# Altium PCB PCB.PcbDoc (part 4 of 6)
Units mm, origin at the board's own origin, x right, y up, seen from the top; angles counter-clockwise.
Board outline 56.61 x 57.68 mm, 2 copper layers (Top Layer, Bottom Layer), stack 0.572 mm thick; 104 components, 100 nets, 551 pads, 332 vias.
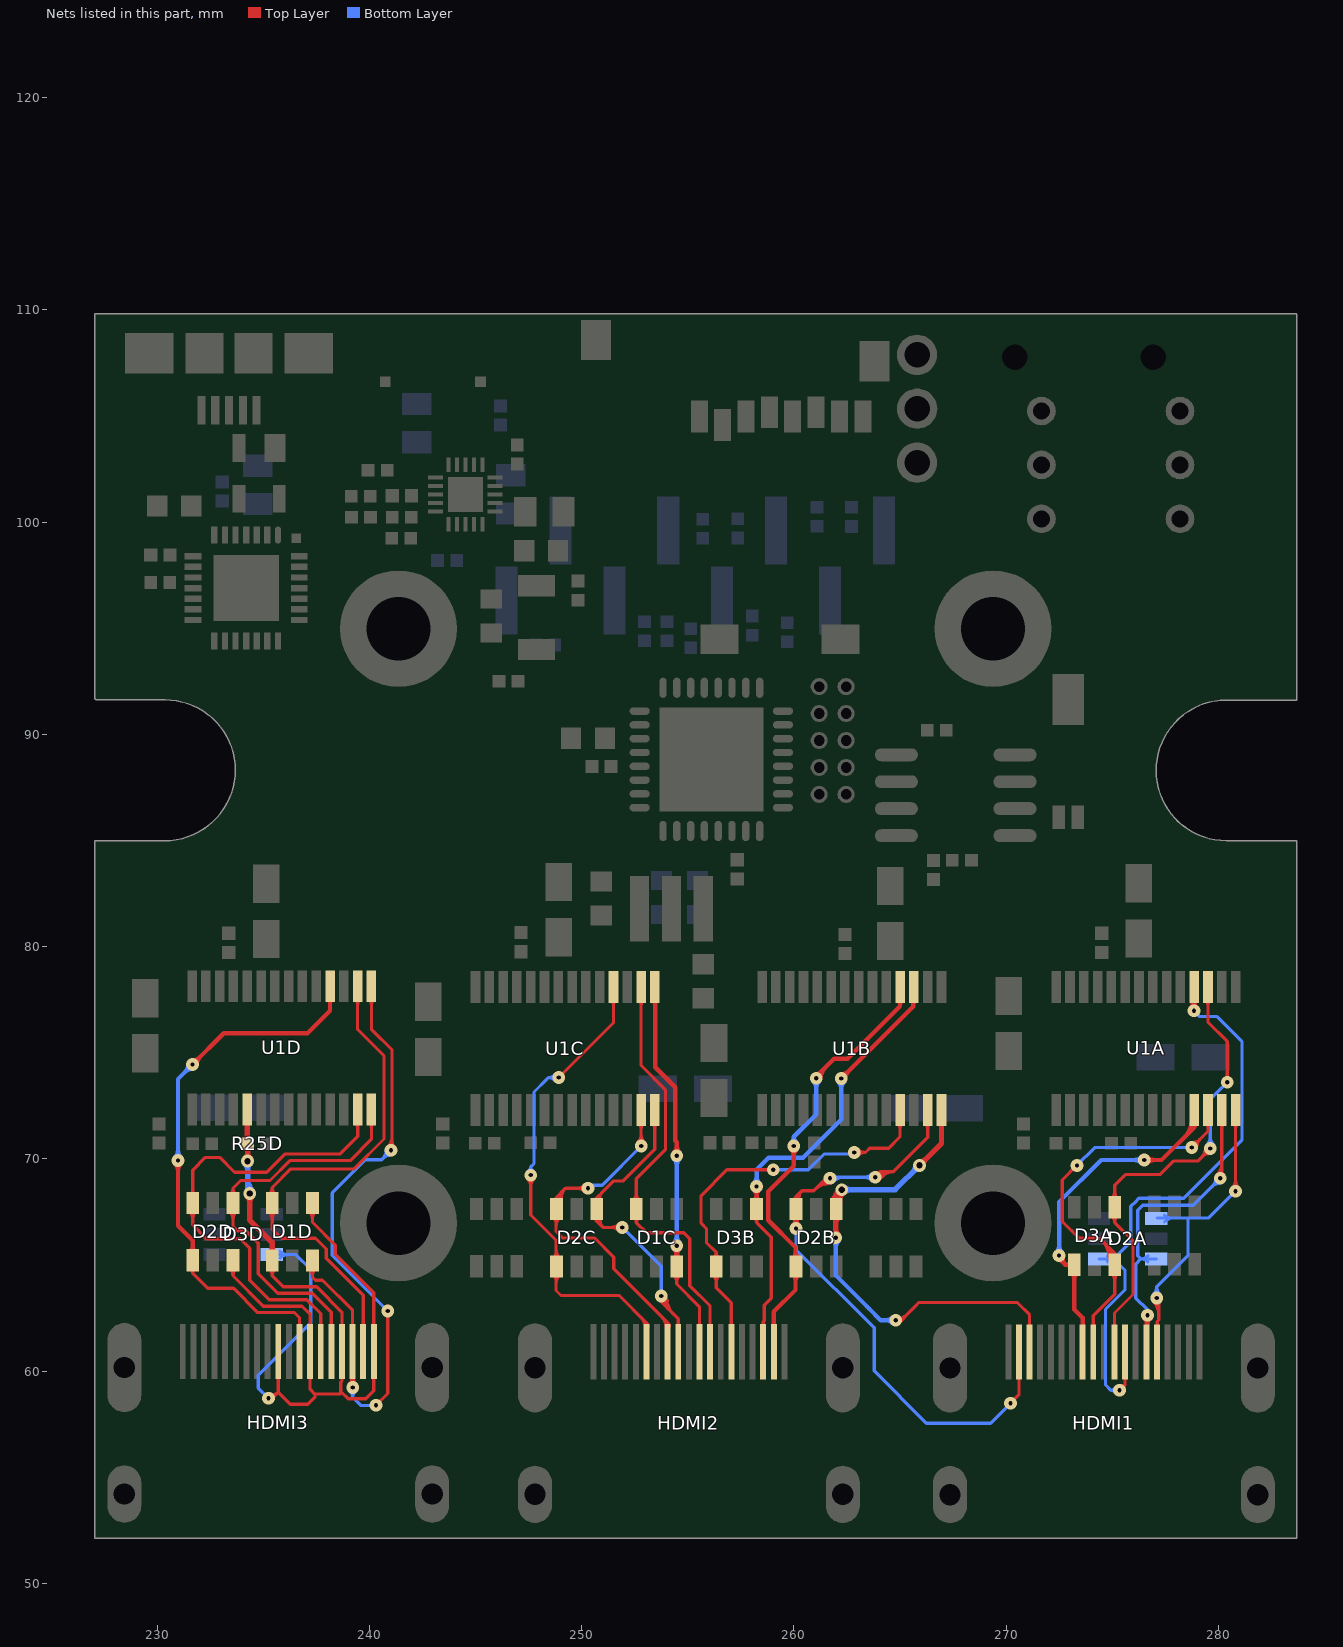
[diagram p4: the nets of this part, all layers, seen from the top]

## Via types
v1: diameter 0.6, hole 0.3, Top Layer to Bottom Layer, tented both sides, 242 vias
v2: diameter 0.6, hole 0.2, Top Layer to Bottom Layer, tented both sides, 80 vias
v3: diameter 0.8, hole 0.4, Top Layer to Bottom Layer, tented both sides, 9 vias
v4: diameter 0.66, hole 0.33, Top Layer to Bottom Layer, tented both sides, 1 vias

## Nets (pads, with @x,y where several pads share a name; then routed paths per layer and width w, separated by ;. In a path a pad name is that pad's centre, name@x,y a point inside that pad or via, vN(x,y) a via of type N, cw(c..) or ccw(c..) an arc to the next point about the centre after c; other vN are vias at no path point) (continued)
NetD1C_3: D1C.3 HDMI2.8 U1C.16 | length 25.1
  Top Layer w0.152: U1C.16@252.8,78.1 252.8,74.402 253.949,73.254 253.949,70.434 252.578,69.063 D1C.3@252.578,67.64 252.578,67.005 ; HDMI2.8@256.05,60.92 256.05,63.076 255.092,64.033 255.092,66.243 254.813,66.523 253.06,66.523 252.578,67.005 ; 252.578,67.005 ccw(c252.314,67.005) 252.457,67.227 cw(c252.314,67.005) 252.578,67.005 ; 252.578,67.005 cw(c252.841,67.005) 252.699,67.227 ccw(c252.841,67.005) 252.578,67.005 ; 252.578,68.405 ccw(c253.118,68.405) 252.736,68.023 cw(c253.118,68.405) 252.578,68.405 ; 252.578,68.405 cw(c252.037,68.405) 252.419,68.023 ccw(c252.037,68.405) 252.578,68.405 ; 252.8,77.216 ccw(c252.441,77.216) 252.695,77.47 cw(c252.441,77.216) 252.8,77.216 ; 252.8,77.216 cw(c253.16,77.216) 252.906,77.47 ccw(c253.16,77.216) 252.8,77.216 ; HDMI2.8@256.007,62.129 ccw(c255.904,62.232) 256.05,62.232 cw(c255.904,62.232) HDMI2.8@256.007,62.129 ; 256.05,62.243 ccw(c256.212,62.243) 256.098,62.129 cw(c256.212,62.243) 256.05,62.243
NetD1C_6: D1C.6 HDMI2.9 U1C.15 | length 32.2
  Top Layer w0.152: 254.478,64.115 D1C.6@254.478,64.94 ; 254.503,64.089 255.55,63.042 HDMI2.9@255.55,60.92 ; 254.478,64.175 ccw(c253.937,64.175) 254.319,64.557 cw(c253.937,64.175) 254.478,64.175 ; 254.478,64.175 cw(c255.018,64.175) 254.636,64.557 ccw(c255.018,64.175) 254.478,64.175 ; HDMI2.9@255.507,62.129 ccw(c255.404,62.232) 255.55,62.232 cw(c255.404,62.232) HDMI2.9@255.507,62.129 ; 255.55,62.243 ccw(c255.712,62.243) 255.598,62.129 cw(c255.712,62.243) 255.55,62.243
  Top Layer w0.203: U1C.15@253.467,78.058 253.467,74.32 254.406,73.381 254.406,70.866 254.483,70.79 v2(254.483,70.155) ; D1C.6@254.369,65.331 ccw(c254.26,65.497) 254.452,65.549 ; D1C.6@254.378,65.337 ccw(c254.249,65.56) 254.499,65.494 ; 254.472,65.474 ccw(c254.689,65.532) D1C.6@254.577,65.337 ; D1C.6@254.483,64.945 254.483,65.811 v2(254.483,65.913) ; 254.518,65.565 ccw(c254.742,65.505) D1C.6@254.599,65.322 ; v2@254.364,65.754 cw(c254.233,65.577) 254.446,65.519 ; v2@254.364,65.754 cw(c254.233,65.577) 254.446,65.519 ; v2@254.364,65.754 cw(c254.233,65.577) 254.446,65.519 ; v2@254.383,65.741 cw(c254.268,65.541) 254.491,65.601 ; v2@254.383,65.741 cw(c254.268,65.541) 254.491,65.601 ; v2@254.383,65.741 cw(c254.268,65.541) 254.491,65.601 ; 254.464,65.588 cw(c254.708,65.523) v2@254.582,65.741 ; 254.464,65.588 cw(c254.708,65.523) v2@254.582,65.741 ; 254.464,65.588 cw(c254.708,65.523) v2@254.582,65.741 ; D1C.6@254.483,65.434 ccw(c254.004,65.434) 254.342,65.773 cw(c254.004,65.434) D1C.6@254.483,65.434 ; D1C.6@254.483,65.434 cw(c254.962,65.434) 254.623,65.773 ccw(c254.962,65.434) D1C.6@254.483,65.434 ; 254.483,70.634 ccw(c254.962,70.634) 254.623,70.295 cw(c254.962,70.634) 254.483,70.634 ; 254.483,70.634 cw(c254.004,70.634) 254.342,70.295 ccw(c254.004,70.634) 254.483,70.634 ; 254.512,65.523 cw(c254.715,65.577) v2@254.595,65.75 ; 254.512,65.523 cw(c254.715,65.577) v2@254.595,65.75 ; 254.512,65.523 cw(c254.715,65.577) v2@254.595,65.75 ; U1C.15@253.363,77.488 cw(c253.113,77.238) 253.467,77.238 ccw(c253.113,77.238) U1C.15@253.363,77.488 ; 253.467,77.316 cw(c253.709,77.316) 253.538,77.488 ccw(c253.709,77.316) 253.467,77.316 ; D1C.6@254.337,65.305 ccw(c253.987,65.656) 254.483,65.656 cw(c253.987,65.656) D1C.6@254.337,65.305 ; v2@254.483,65.632 ccw(c254.945,65.632) 254.618,65.305 cw(c254.945,65.632) v2@254.483,65.632
  Bottom Layer w0.203: v2(254.483,65.913) v2(254.483,70.155) ; 254.483,66.392 ccw(c254.962,66.392) 254.623,66.053 cw(c254.962,66.392) 254.483,66.392 ; 254.483,66.392 cw(c254.004,66.392) 254.342,66.053 ccw(c254.004,66.392) 254.483,66.392 ; 254.483,69.676 ccw(c254.004,69.676) 254.342,70.015 cw(c254.004,69.676) 254.483,69.676 ; 254.483,69.676 cw(c254.962,69.676) 254.623,70.015 ccw(c254.962,69.676) 254.483,69.676
NetD1D_1: D1D.1 D1D.4 D2D.6 D3D.3 HDMI3.1 HDMI3.4 HDMI3.7 HDMI3.10 R25D.2 U1D.5 | length 73.7
  Top Layer w0.152: D2D.6@233.578,65.227 233.578,64.491 ; v2(235.255,58.725) 235.43,58.725 235.711,59.006 ; D1D.4@235.422,65.223 235.422,64.501 ; 235.711,59.028 HDMI3.10@235.711,60.935 ; D1D.1@237.322,67.923 237.322,67.012 238.396,65.938 238.396,65.515 240.211,63.7 HDMI3.1@240.211,60.935 240.211,59.083 239.832,58.704 238.998,58.704 238.689,59.014 238.658,58.984 ; HDMI3.4@238.689,60.913 HDMI3.4@238.709,60.933 ; 233.578,64.491 ccw(c233.106,64.491) 233.427,64.838 cw(c233.106,64.491) 233.578,64.491 ; 233.578,64.491 cw(c234.051,64.491) 233.73,64.838 ccw(c234.051,64.491) 233.578,64.491 ; 233.578,64.491 235.001,63.068 236.83,63.068 237.211,62.687 HDMI3.7@237.211,60.935 237.211,59.157 237.439,58.928 ; 235.422,64.501 ccw(c234.981,64.501) 235.274,64.831 cw(c234.981,64.501) 235.422,64.501 ; 235.422,64.501 cw(c235.864,64.501) 235.571,64.831 ccw(c235.864,64.501) 235.422,64.501 ; 235.422,64.501 235.941,63.983 237.515,63.983 238.711,62.787 HDMI3.4@238.711,60.935 HDMI3.4@238.709,60.933 ; 235.711,59.006 cw(c235.47,59.246) 235.34,58.932 ccw(c235.47,59.246) 235.711,59.006 ; 235.711,59.006 236.271,58.445 237.109,58.445 237.439,58.776 237.439,58.928 ; 235.711,59.621 ccw(c235.557,59.621) 235.665,59.729 cw(c235.557,59.621) 235.711,59.621 ; 235.711,59.621 cw(c235.865,59.621) 235.756,59.729 ccw(c235.865,59.621) 235.711,59.621 ; 237.211,59.621 ccw(c237.057,59.621) 237.165,59.729 cw(c237.057,59.621) 237.211,59.621 ; 237.211,59.621 cw(c237.365,59.621) 237.256,59.729 ccw(c237.365,59.621) 237.211,59.621 ; 237.211,62.249 ccw(c237.365,62.249) 237.256,62.14 cw(c237.365,62.249) 237.211,62.249 ; 237.211,62.249 cw(c237.057,62.249) 237.165,62.14 ccw(c237.057,62.249) 237.211,62.249 ; 237.322,67.158 ccw(c236.782,67.158) 237.164,67.54 cw(c236.782,67.158) 237.322,67.158 ; 237.322,67.158 cw(c237.863,67.158) 237.481,67.54 ccw(c237.863,67.158) 237.322,67.158 ; 237.439,58.928 238.603,58.928 238.658,58.984 ; 238.658,58.984 238.658,59.487 238.709,59.538 HDMI3.4@238.709,60.933 ; 238.711,62.249 ccw(c238.865,62.249) 238.756,62.14 cw(c238.865,62.249) 238.711,62.249 ; 238.711,62.249 cw(c238.557,62.249) 238.665,62.14 ccw(c238.557,62.249) 238.711,62.249 ; 240.211,59.621 ccw(c240.057,59.621) 240.165,59.729 cw(c240.057,59.621) 240.211,59.621 ; 240.211,59.621 cw(c240.365,59.621) 240.256,59.729 ccw(c240.365,59.621) 240.211,59.621 ; 240.211,62.249 ccw(c240.365,62.249) 240.256,62.14 cw(c240.365,62.249) 240.211,62.249 ; 240.211,62.249 cw(c240.057,62.249) 240.165,62.14 ccw(c240.057,62.249) 240.211,62.249 ; v2@235.282,58.791 ccw(c235.376,59.018) 235.549,58.844 cw(c235.376,59.018) v2@235.282,58.791 ; HDMI3.4@238.665,59.729 cw(c238.56,59.624) 238.709,59.624 ccw(c238.56,59.624) HDMI3.4@238.665,59.729 ; 238.709,59.617 cw(c238.868,59.617) 238.756,59.729 ccw(c238.868,59.617) 238.709,59.617
  Top Layer w0.254: R25D.2@234.25,70.727 U1D.5@234.25,72.339 ; v1(234.264,69.901) R25D.2@234.264,70.714 ; v1(234.366,68.377) 234.366,67.132 235.422,66.076 D1D.4@235.422,65.223 ; 234.25,71.578 ccw(c234.014,71.578) 234.181,71.745 cw(c234.014,71.578) 234.25,71.578 ; 234.25,71.578 cw(c234.487,71.578) 234.32,71.745 ccw(c234.487,71.578) 234.25,71.578 ; 234.264,70.296 ccw(c233.847,70.296) 234.142,70.591 cw(c233.847,70.296) 234.264,70.296 ; 234.264,70.296 cw(c234.682,70.296) 234.387,70.591 ccw(c234.682,70.296) 234.264,70.296 ; 234.264,70.318 ccw(c234.682,70.318) 234.387,70.023 cw(c234.682,70.318) 234.264,70.318 ; 234.264,70.318 cw(c233.847,70.318) 234.142,70.023 ccw(c233.847,70.318) 234.264,70.318 ; 234.366,67.959 ccw(c233.948,67.959) 234.243,68.254 cw(c233.948,67.959) 234.366,67.959 ; 234.366,67.959 cw(c234.783,67.959) 234.488,68.254 ccw(c234.783,67.959) 234.366,67.959 ; 235.422,65.866 ccw(c235.84,65.866) 235.545,65.571 cw(c235.84,65.866) 235.422,65.866 ; 235.422,65.866 cw(c235.005,65.866) 235.3,65.571 ccw(c235.005,65.866) 235.422,65.866 ; R25D.2@234.142,70.836 ccw(c233.88,71.098) 234.25,71.098 cw(c233.88,71.098) R25D.2@234.142,70.836 ; 234.25,71.165 ccw(c234.715,71.165) 234.387,70.836 cw(c234.715,71.165) 234.25,71.165
  Bottom Layer w0.152: v2(235.255,58.725) 234.772,59.207 234.772,59.817 237.236,62.281 237.236,64.795 236.535,65.496 D3D.3@235.407,65.496 ; 236.172,65.496 ccw(c236.172,64.956) 235.79,65.338 cw(c236.172,64.956) 236.172,65.496 ; 236.172,65.496 cw(c236.172,66.037) 235.79,65.655 ccw(c236.172,66.037) 236.172,65.496
  Bottom Layer w0.254: v1(234.264,69.901) 234.264,68.631 234.366,68.529 v1(234.366,68.377) ; v1@234.278,68.526 ccw(c234.19,68.673) 234.338,68.758 ; 234.264,69.483 ccw(c233.847,69.483) 234.142,69.778 cw(c233.847,69.483) 234.264,69.483 ; 234.264,69.483 cw(c234.682,69.483) 234.387,69.778 ccw(c234.682,69.483) 234.264,69.483 ; 234.264,69.04 ccw(c235.029,69.04) 234.488,68.499 cw(c235.029,69.04) 234.264,69.04
NetD1D_3: D1D.3 HDMI3.2 U1D.16 | length 29.2
  Top Layer w0.152: 235.422,66.711 D1D.3@235.422,67.923 235.422,68.657 ; 235.433,66.7 235.864,66.269 237.465,66.269 237.973,65.761 237.973,65.329 239.711,63.591 HDMI3.2@239.711,60.935 ; U1D.16@239.446,78.135 239.446,76.098 240.69,74.854 240.69,70.942 239.281,69.532 236.298,69.532 235.422,68.657 ; 235.422,67.158 ccw(c234.882,67.158) 235.264,67.54 cw(c234.882,67.158) 235.422,67.158 ; 235.422,67.158 cw(c235.963,67.158) 235.581,67.54 ccw(c235.963,67.158) 235.422,67.158 ; 235.422,68.657 ccw(c235.888,68.657) 235.574,68.313 cw(c235.888,68.657) 235.422,68.657 ; 235.422,68.657 cw(c234.957,68.657) 235.271,68.313 ccw(c234.957,68.657) 235.422,68.657 ; 239.711,62.249 ccw(c239.865,62.249) 239.756,62.14 cw(c239.865,62.249) 239.711,62.249 ; 239.711,62.249 cw(c239.557,62.249) 239.665,62.14 ccw(c239.557,62.249) 239.711,62.249 ; U1D.16@239.345,77.509 cw(c239.102,77.266) 239.446,77.266 ccw(c239.102,77.266) U1D.16@239.345,77.509 ; 239.446,77.244 cw(c239.821,77.244) 239.556,77.509 ccw(c239.821,77.244) 239.446,77.244
NetD1D_6: D1D.6 HDMI3.3 U1D.15 | length 42.6
  Top Layer w0.152: D1D.6@237.322,65.223 237.322,64.43 237.465,64.287 237.795,64.287 239.211,62.872 HDMI3.3@239.211,60.935 239.217,60.928 v2(239.217,59.233) ; HDMI3.3@239.155,59.743 cw(c239.002,59.654) 239.173,59.608 ; HDMI3.3@239.179,59.719 cw(c239.091,59.568) 239.26,59.613 ; U1D.15@240.1,78.139 240.1,76.104 241.071,75.133 241.071,70.46 v2(241.021,70.409) ; v2(240.309,58.395) 240.868,58.953 v2(240.868,62.84) ; 237.322,64.458 ccw(c236.782,64.458) 237.164,64.84 cw(c236.782,64.458) 237.322,64.458 ; 237.322,64.458 cw(c237.863,64.458) 237.481,64.84 ccw(c237.863,64.458) 237.322,64.458 ; 239.211,62.249 ccw(c239.365,62.249) 239.256,62.14 cw(c239.365,62.249) 239.211,62.249 ; 239.211,62.249 cw(c239.057,62.249) 239.165,62.14 ccw(c239.057,62.249) 239.211,62.249 ; HDMI3.3@239.217,59.773 ccw(c239.757,59.773) 239.375,59.391 cw(c239.757,59.773) HDMI3.3@239.217,59.773 ; HDMI3.3@239.217,59.773 cw(c238.677,59.773) 239.059,59.391 ccw(c238.677,59.773) HDMI3.3@239.217,59.773 ; 240.1,77.255 ccw(c239.741,77.255) 239.995,77.509 cw(c239.741,77.255) 240.1,77.255 ; 240.1,77.255 cw(c240.46,77.255) 240.206,77.509 ccw(c240.46,77.255) 240.1,77.255 ; HDMI3.3@239.165,59.729 cw(c239.041,59.605) 239.217,59.605 ccw(c239.041,59.605) HDMI3.3@239.165,59.729 ; v2@240.862,70.567 ccw(c240.358,71.072) 241.071,71.072 cw(c240.358,71.072) v2@240.862,70.567 ; 241.071,70.826 ccw(c241.438,70.826) 241.179,70.567 cw(c241.438,70.826) 241.071,70.826
  Bottom Layer w0.152: 238.252,66.591 238.252,67.183 ; v2(239.217,59.233) 239.217,58.776 ; v2(240.309,58.395) 239.598,58.395 239.217,58.776 ; v2(240.868,62.84) 238.252,65.456 238.252,67.183 ; v2(241.021,70.409) 240.575,69.964 239.813,69.964 238.252,68.402 238.252,67.183 ; 239.217,58.776 ccw(c238.862,58.776) 239.08,59.056 cw(c238.862,58.776) 239.217,58.776 ; 239.217,58.776 cw(c239.572,58.776) 239.354,59.056 ccw(c239.572,58.776) 239.217,58.776 ; 240.639,70.027 ccw(c240.257,70.409) 240.797,70.409 cw(c240.257,70.409) 240.639,70.027 ; 240.639,70.027 cw(c241.021,69.645) 241.021,70.185 ccw(c241.021,69.645) 240.639,70.027
NetD2A_1: D2A.1 HDMI1.5 U1A.14 | length 24.1
  Top Layer w0.152: v2(277.089,63.449) 277.185,63.352 277.185,62.417 277.114,62.346 277.114,60.923 HDMI1.5@277.1,60.909 ; v2(280.797,68.478) 280.806,68.487 U1A.14@280.806,72.309 ; 280.806,71.425 ccw(c280.446,71.425) 280.7,71.679 cw(c280.446,71.425) 280.806,71.425 ; 280.806,71.425 cw(c281.165,71.425) 280.911,71.679 ccw(c281.165,71.425) 280.806,71.425 ; v2@276.93,63.291 cw(c276.315,62.675) 277.185,62.675 ccw(c276.315,62.675) v2@276.93,63.291 ; v2@277.038,63.399 cw(c276.683,63.043) 277.185,63.043 ccw(c276.683,63.043) v2@277.038,63.399 ; HDMI1.5@277.055,62.114 ccw(c276.912,62.257) 277.114,62.257 cw(c276.912,62.257) HDMI1.5@277.055,62.114 ; 277.185,63.143 cw(c277.395,63.143) 277.247,63.291 ccw(c277.395,63.143) 277.185,63.143 ; v2@280.639,68.637 ccw(c280.236,69.039) 280.806,69.039 cw(c280.236,69.039) v2@280.639,68.637 ; 280.806,68.998 ccw(c281.317,68.998) 280.955,68.637 cw(c281.317,68.998) 280.806,68.998
  Bottom Layer w0.152: v2(277.089,63.449) 277.089,63.983 ; D2A.1@277.101,67.224 278.506,67.224 ; 278.557,67.181 278.557,67.173 ; v2(280.797,68.478) 279.542,67.224 278.506,67.224 ; 277.089,63.983 ccw(c277.612,63.983) 277.245,63.609 cw(c277.612,63.983) 277.089,63.983 ; 277.089,63.983 cw(c276.565,63.983) 276.932,63.609 ccw(c276.565,63.983) 277.089,63.983 ; 277.089,63.983 278.557,65.451 278.557,67.173 ; 278.506,67.224 278.557,67.173 ; D2A.1@277.454,67.035 cw(c277.909,66.58) 277.909,67.224 ccw(c277.909,66.58) D2A.1@277.454,67.035 ; D2A.1@277.454,67.351 ccw(c277.763,67.66) 277.763,67.224 cw(c277.763,67.66) D2A.1@277.454,67.351
NetD2A_3: D2A.3 HDMI1.6 U1A.13 | length 25.2
  Top Layer w0.152: HDMI1.6@276.568,62.124 ccw(c276.442,62.342) 276.685,62.277 ; HDMI1.6@276.6,60.909 276.6,62.58 v2(276.657,62.636) ; v2(280.086,69.088) 280.156,69.158 U1A.13@280.156,72.309 ; 276.6,62.223 ccw(c276.754,62.223) 276.645,62.114 cw(c276.754,62.223) 276.6,62.223 ; 276.6,62.223 cw(c276.446,62.223) 276.555,62.114 ccw(c276.446,62.223) 276.6,62.223 ; 280.156,71.425 ccw(c279.796,71.425) 280.05,71.679 cw(c279.796,71.425) 280.156,71.425 ; 280.156,71.425 cw(c280.515,71.425) 280.261,71.679 ccw(c280.515,71.425) 280.156,71.425 ; v2@276.499,62.478 cw(c276.254,62.233) 276.6,62.233 ccw(c276.254,62.233) v2@276.499,62.478 ; HDMI1.6@276.6,61.959 cw(c277.334,61.959) 276.815,62.478 ccw(c277.334,61.959) HDMI1.6@276.6,61.959 ; 276.6,62.327 cw(c276.966,62.327) 276.707,62.586 ccw(c276.966,62.327) 276.6,62.327 ; v2@279.928,69.246 ccw(c279.377,69.797) 280.156,69.797 cw(c279.377,69.797) v2@279.928,69.246 ; v2@280.035,69.138 ccw(c279.745,69.429) 280.156,69.429 cw(c279.745,69.429) v2@280.035,69.138 ; 280.156,69.46 ccw(c280.458,69.46) 280.244,69.246 cw(c280.458,69.46) 280.156,69.46
  Bottom Layer w0.152: v2(276.657,62.636) 276.657,62.89 276.098,63.449 276.098,65.049 276.342,65.293 ; D2A.3@277.071,65.293 276.342,65.293 ; v2(280.086,69.088) 278.816,67.818 276.428,67.818 276.2,67.589 276.2,65.435 276.342,65.293 ; 276.342,65.293 ccw(c276.342,65.749) 276.68,65.443 cw(c276.342,65.749) 276.342,65.293 ; 276.342,65.293 cw(c276.342,64.838) 276.68,65.143 ccw(c276.342,64.838) 276.342,65.293 ; 279.704,68.706 ccw(c279.322,69.088) 279.862,69.088 cw(c279.322,69.088) 279.704,68.706 ; 279.704,68.706 cw(c280.086,68.324) 280.086,68.864 ccw(c280.086,68.324) 279.704,68.706
NetD2A_4: D2A.4 HDMI1.8 U1A.18 | length 37.7
  Top Layer w0.152: v2(275.336,59.106) 275.6,59.37 ; HDMI1.8@275.6,60.909 275.6,59.37 ; U1A.18@278.731,77.504 cw(c278.474,77.338) 278.769,77.259 cw(c279.067,77.179) U1A.18@278.924,77.452 ; 278.769,77.354 cw(c278.475,77.354) v2@278.683,77.146 ; U1A.18@278.769,77.417 ccw(c279.005,77.417) v2@278.921,77.197 ; U1A.18@278.784,77.454 cw(c278.669,77.243) 278.901,77.305 cw(c279.058,77.348) U1A.18@278.952,77.471 ; v2(278.841,76.987) U1A.18@278.841,78.095 ; 275.6,59.37 ccw(c275.741,59.229) 275.55,59.171 cw(c275.741,59.229) 275.6,59.37 ; 275.6,59.37 cw(c275.459,59.511) 275.401,59.32 ccw(c275.459,59.511) 275.6,59.37 ; 275.6,59.595 ccw(c275.446,59.595) 275.555,59.704 cw(c275.446,59.595) 275.6,59.595 ; 275.6,59.595 cw(c275.754,59.595) 275.645,59.704 ccw(c275.754,59.595) 275.6,59.595 ; v2@278.683,77.146 ccw(c278.301,77.528) U1A.18@278.841,77.528 ; v2@278.683,77.146 ccw(c278.301,77.528) U1A.18@278.841,77.528 ; v2@278.771,77.2 ccw(c278.723,77.347) 278.872,77.307 ; v2@278.771,77.2 ccw(c278.723,77.347) 278.872,77.307 ; v2@278.771,77.2 ccw(c278.723,77.347) 278.872,77.307 ; v2@278.778,77.202 ccw(c278.756,77.277) 278.831,77.297 ; v2@278.778,77.202 ccw(c278.756,77.277) 278.831,77.297 ; v2@278.778,77.202 ccw(c278.756,77.277) 278.831,77.297 ; 278.831,77.297 ccw(c278.976,77.336) v2@278.922,77.196 ; 278.831,77.297 ccw(c278.976,77.336) v2@278.922,77.196 ; 278.831,77.297 ccw(c278.976,77.336) v2@278.922,77.196 ; U1A.18@278.841,77.528 ccw(c279.381,77.528) 278.999,77.146 cw(c279.381,77.528) U1A.18@278.841,77.528 ; 278.872,77.307 ccw(c278.965,77.282) v2@278.928,77.194 ; 278.872,77.307 ccw(c278.965,77.282) v2@278.928,77.194 ; 278.872,77.307 ccw(c278.965,77.282) v2@278.928,77.194 ; U1A.18@278.75,77.479 cw(c278.531,77.26) 278.841,77.26 ccw(c278.531,77.26) U1A.18@278.75,77.479 ; v2@278.841,77.19 cw(c279.25,77.19) 278.961,77.479 ccw(c279.25,77.19) v2@278.841,77.19
  Bottom Layer w0.152: D2A.4@274.371,65.293 275.067,65.293 ; v2(275.336,59.106) 274.93,59.106 ; 275.92,67.818 276.073,67.97 ; v2(278.841,76.987) 279.121,76.708 279.933,76.708 281.102,75.54 281.102,70.891 278.359,68.148 276.25,68.148 276.073,67.97 ; 274.93,59.106 ccw(c274.93,59.363) 275.147,59.225 cw(c274.93,59.363) 274.93,59.106 ; 274.93,59.106 cw(c274.93,58.849) 275.147,58.986 ccw(c274.93,58.849) 274.93,59.106 ; 274.93,59.106 274.676,59.36 274.676,62.916 275.59,63.83 275.59,64.77 275.067,65.293 ; 275.067,65.293 ccw(c275.067,64.91) 274.769,65.152 cw(c275.067,64.91) 275.067,65.293 ; 275.067,65.293 cw(c275.067,65.677) 274.769,65.435 ccw(c275.067,65.677) 275.067,65.293 ; 275.067,65.293 275.869,66.096 275.869,67.767 276.073,67.97
NetD2B_1: D2B.1 HDMI1.17 U1B.14 | length 47.9
  Top Layer w0.152: 265.125,62.484 265.189,62.547 265.735,63.094 ; 265.811,63.17 265.735,63.094 ; 268.538,63.241 268.732,63.241 ; HDMI1.17@271.1,60.909 271.1,62.656 270.515,63.241 268.732,63.241 ; 265.735,63.094 265.882,63.241 268.732,63.241 ; 271.1,62.223 ccw(c271.254,62.223) 271.145,62.114 cw(c271.254,62.223) 271.1,62.223 ; 271.1,62.223 cw(c270.946,62.223) 271.055,62.114 ccw(c270.946,62.223) 271.1,62.223
  Top Layer w0.203: v2(264.795,62.408) 265.049,62.408 265.189,62.547
  Top Layer w0.254: 261.892,68.171 ccw(c261.72,68.494) v1@262.083,68.535 ; v2(261.976,66.294) D2B.1@261.976,67.635 ; D2B.1@261.981,67.64 261.981,68.28 ; 262.003,68.333 cw(c262.137,68.238) v1@262.195,68.392 ; D2B.1@262.081,68.018 ccw(c261.734,68.263) v1@262.104,68.47 ; v1@262.085,68.521 cw(c261.845,68.473) 262.025,68.306 ; v1@262.089,68.507 cw(c261.687,68.393) 262.052,68.19 cw(c262.416,67.986) v1@262.302,68.388 ; D2B.1@262.114,67.991 cw(c262.332,68.224) 262.025,68.306 ; v1@262.234,68.383 ccw(c262.204,68.139) 262.025,68.306 ; v1(265.913,69.698) 266.95,70.735 U1B.14@266.95,72.3 ; D2B.1@261.869,68.071 cw(c262.445,67.738) v1@262.294,68.386 ; D2B.1@261.869,68.071 cw(c262.445,67.738) v1@262.294,68.386 ; D2B.1@261.869,68.071 cw(c262.445,67.738) v1@262.294,68.386 ; 261.976,66.712 ccw(c262.393,66.712) 262.098,66.416 cw(c262.393,66.712) 261.976,66.712 ; 261.976,66.712 cw(c261.558,66.712) 261.853,66.416 ccw(c261.558,66.712) 261.976,66.712 ; 261.976,68.256 cw(c262.2,68.127) v1@262.233,68.383 ; 261.976,68.256 cw(c262.2,68.127) v1@262.233,68.383 ; 261.976,68.256 cw(c262.2,68.127) v1@262.233,68.383 ; 261.981,68.28 ccw(c262.359,68.28) 262.11,67.995 cw(c262.359,68.28) 261.981,68.28 ; 261.981,68.28 ccw(c261.734,68.527) 262.082,68.545 cw(c261.734,68.527) 261.981,68.28 ; 261.981,68.28 cw(c262.227,68.034) 262.246,68.382 ccw(c262.227,68.034) 261.981,68.28 ; 261.981,68.28 v1(262.255,68.555) ; v1(262.255,68.555) ccw(c262.635,68.175) 262.152,67.941 cw(c262.635,68.175) v1(262.255,68.555) ; 266.208,69.993 ccw(c266.503,69.698) 266.086,69.698 cw(c266.503,69.698) 266.208,69.993 ; 266.208,69.993 cw(c265.913,70.288) 265.913,69.871 ccw(c265.913,70.288) 266.208,69.993 ; 266.95,71.538 ccw(c266.714,71.538) 266.881,71.706 cw(c266.714,71.538) 266.95,71.538 ; 266.95,71.538 cw(c267.187,71.538) 267.02,71.706 ccw(c267.187,71.538) 266.95,71.538 ; D2B.1@261.874,67.293 cw(c261.628,67.047) 261.976,67.047 ccw(c261.628,67.047) D2B.1@261.874,67.293 ; D2B.1@261.874,67.988 ccw(c261.616,68.246) 261.981,68.246 cw(c261.616,68.246) D2B.1@261.874,67.988 ; D2B.1@261.923,67.83 cw(c262.295,68.01) 262.003,68.302 ccw(c262.295,68.01) D2B.1@261.923,67.83 ; 261.976,66.948 cw(c262.463,66.948) 262.118,67.293 ccw(c262.463,66.948) 261.976,66.948 ; D2B.1@261.981,67.6 cw(c263.05,67.6) 262.366,68.422 ccw(c263.05,67.6) D2B.1@261.981,67.6 ; D2B.1@261.981,68.142 cw(c262.599,68.142) 262.203,68.617 ccw(c262.599,68.142) D2B.1@261.981,68.142
  Bottom Layer w0.203: v2(261.976,66.294) 261.976,64.516 263.373,63.119 ; 263.449,63.043 263.373,63.119 ; 263.55,62.941 263.487,63.005 ; v2(264.795,62.408) 264.084,62.408 263.487,63.005 ; 261.976,65.815 ccw(c261.497,65.815) 261.835,66.154 cw(c261.497,65.815) 261.976,65.815 ; 261.976,65.815 cw(c262.455,65.815) 262.116,66.154 ccw(c262.455,65.815) 261.976,65.815 ; 263.373,63.119 263.487,63.005 ; 264.316,62.408 ccw(c264.316,62.887) 264.655,62.548 cw(c264.316,62.887) 264.316,62.408 ; 264.316,62.408 cw(c264.316,61.929) 264.655,62.268 ccw(c264.316,61.929) 264.316,62.408
  Bottom Layer w0.254: v1(262.255,68.555) 264.77,68.555 v1(265.913,69.698) ; 262.673,68.555 ccw(c262.673,68.137) 262.377,68.432 cw(c262.673,68.137) 262.673,68.555 ; 262.673,68.555 cw(c262.673,68.972) 262.377,68.677 ccw(c262.673,68.972) 262.673,68.555 ; 265.617,69.402 ccw(c265.322,69.698) 265.74,69.698 cw(c265.322,69.698) 265.617,69.402 ; 265.617,69.402 cw(c265.913,69.107) 265.913,69.525 ccw(c265.913,69.107) 265.617,69.402
NetD2B_3: D2B.3 HDMI1.18 U1B.13 | length 53.6
  Top Layer w0.152: D2B.3@260.096,67.64 260.096,68.224 ; 261.162,68.721 ccw(c260.976,69.417) v2@261.631,69.118 ; 261.353,68.925 cw(c261.432,68.63) v2@261.584,68.894 ; 261.475,68.805 ccw(c261.358,69.243) v2@261.77,69.054 ; v2(261.696,69.088) 261.518,69.088 260.934,68.504 260.375,68.504 ; v2(263.83,69.139) 264.089,69.398 ; v2@263.88,69.189 ccw(c264.035,69.345) 264.189,69.189 ; v2@263.971,69.312 ccw(c264.037,69.394) 264.111,69.319 ccw(c264.25,69.178) v2@264.053,69.159 ; v2@263.987,69.298 ccw(c264.143,69.455) 264.298,69.297 ; U1B.13@266.3,72.3 266.3,71.025 264.673,69.398 ; v2(270.205,58.496) 270.6,58.891 HDMI1.18@270.6,60.909 ; 260.096,68.224 ccw(c260.272,68.224) 260.195,68.066 cw(c260.272,68.224) 260.096,68.224 ; 260.096,68.224 cw(c259.92,68.224) 259.997,68.066 ccw(c259.92,68.224) 260.096,68.224 ; 260.096,68.224 260.375,68.504 ; 260.375,68.504 ccw(c260.698,68.181) 260.294,67.969 cw(c260.698,68.181) 260.375,68.504 ; 264.089,69.398 ccw(c264.221,69.265) 264.043,69.208 cw(c264.221,69.265) 264.089,69.398 ; 264.089,69.398 cw(c263.956,69.53) 263.899,69.352 ccw(c263.956,69.53) 264.089,69.398 ; 264.089,69.398 264.673,69.398 ; 264.673,69.398 ccw(c264.673,68.644) 264.023,69.025 cw(c264.673,68.644) 264.673,69.398 ; 266.3,71.416 ccw(c265.941,71.416) 266.195,71.67 cw(c265.941,71.416) 266.3,71.416 ; 266.3,71.416 cw(c266.66,71.416) 266.406,71.67 ccw(c266.66,71.416) 266.3,71.416 ; 270.6,59.595 ccw(c270.446,59.595) 270.555,59.704 cw(c270.446,59.595) 270.6,59.595 ; 270.6,59.595 cw(c270.754,59.595) 270.645,59.704 ccw(c270.754,59.595) 270.6,59.595 ; D2B.3@260.024,67.828 cw(c260.314,67.98) 260.083,68.211 ccw(c260.314,67.98) D2B.3@260.024,67.828 ; D2B.3@260.159,67.898 cw(c260.506,68.08) 260.229,68.357 ccw(c260.506,68.08) D2B.3@260.159,67.898 ; 261.011,68.58 cw(c261.696,67.895) 261.696,68.864 ccw(c261.696,67.895) 261.011,68.58 ; 261.271,68.84 cw(c261.696,68.415) 261.696,69.017 ccw(c261.696,68.415) 261.271,68.84 ; v2@263.76,69.18 cw(c264.14,68.956) 264.14,69.398 ccw(c264.14,68.956) v2@263.76,69.18 ; v2@263.891,69.103 cw(c264.407,68.8) 264.407,69.398 ccw(c264.407,68.8) v2@263.891,69.103
  Top Layer w0.203: D2B.3@259.984,67.251 cw(c259.883,67.103) 260.056,67.056 ; D2B.3@259.997,67.243 cw(c259.85,66.99) 260.133,67.065 ; 260.059,67.065 cw(c260.342,66.99) D2B.3@260.195,67.243 ; v2(260.096,66.726) D2B.3@260.096,67.64 ; 260.136,67.056 cw(c260.309,67.103) D2B.3@260.208,67.251 ; v2@259.984,66.89 ccw(c259.883,67.038) 260.056,67.085 ; v2@259.984,66.89 ccw(c259.883,67.038) 260.056,67.085 ; v2@259.984,66.89 ccw(c259.883,67.038) 260.056,67.085 ; v2@259.997,66.898 ccw(c259.85,67.151) 260.133,67.076 ; v2@259.997,66.898 ccw(c259.85,67.151) 260.133,67.076 ; v2@259.997,66.898 ccw(c259.85,67.151) 260.133,67.076 ; 260.059,67.076 ccw(c260.342,67.151) v2@260.195,66.898 ; 260.059,67.076 ccw(c260.342,67.151) v2@260.195,66.898 ; 260.059,67.076 ccw(c260.342,67.151) v2@260.195,66.898 ; v2@260.096,66.936 ccw(c259.617,66.936) 259.956,67.275 cw(c259.617,66.936) v2@260.096,66.936 ; v2@260.096,66.936 cw(c260.575,66.936) 260.236,67.275 ccw(c260.575,66.936) v2@260.096,66.936 ; D2B.3@260.096,67.205 ccw(c260.575,67.205) 260.236,66.866 cw(c260.575,67.205) D2B.3@260.096,67.205 ; D2B.3@260.096,67.205 cw(c259.617,67.205) 259.956,66.866 ccw(c259.617,67.205) D2B.3@260.096,67.205 ; 260.136,67.085 ccw(c260.309,67.038) v2@260.208,66.89 ; 260.136,67.085 ccw(c260.309,67.038) v2@260.208,66.89 ; 260.136,67.085 ccw(c260.309,67.038) v2@260.208,66.89
  Bottom Layer w0.152: v2(260.096,66.726) 260.096,65.735 263.779,62.052 263.779,60.02 266.243,57.556 268.884,57.556 ; v2(261.696,69.088) 261.747,69.139 v2(263.83,69.139) ; 268.986,57.556 268.884,57.556 ; v2(270.205,58.496) 269.265,57.556 268.884,57.556 ; 263.29,69.139 ccw(c263.29,69.679) 263.672,69.297 cw(c263.29,69.679) 263.29,69.139 ; 263.29,69.139 cw(c263.29,68.599) 263.672,68.981 ccw(c263.29,68.599) 263.29,69.139 ; v2@261.854,68.93 cw(c262.359,68.425) 262.359,69.139 ccw(c262.359,68.425) v2@261.854,68.93 ; v2@261.854,69.246 ccw(c262.114,69.506) 262.114,69.139 cw(c262.114,69.506) v2@261.854,69.246
NetD2B_4: D2B.4 HDMI2.2 U1B.18 | length 31.2
  Top Layer w0.203: HDMI2.2@259.05,60.92 259.05,62.81 260.071,63.83 260.071,65.837 258.791,67.117 258.791,68.473 259.994,69.676 v2(259.994,70.612) ; v2(261.053,73.804) 261.053,73.881 261.899,74.727 262.534,74.727 264.998,77.191 U1B.18@264.998,78.077 ; v2@261.055,73.8 ccw(c260.92,74.2) 261.328,74.091 ; 259.994,70.133 ccw(c259.515,70.133) 259.854,70.472 cw(c259.515,70.133) 259.994,70.133 ; 259.994,70.133 cw(c260.473,70.133) 260.135,70.472 ccw(c260.473,70.133) 259.994,70.133 ; D2B.4@259.956,64.575 cw(c259.678,64.298) 260.071,64.298 ccw(c259.678,64.298) D2B.4@259.956,64.575 ; D2B.4@259.956,65.305 ccw(c259.678,65.583) 260.071,65.583 cw(c259.678,65.583) D2B.4@259.956,65.305 ; 260.071,64.175 cw(c260.636,64.175) 260.236,64.575 ccw(c260.636,64.175) 260.071,64.175 ; 260.071,65.705 ccw(c260.636,65.705) 260.236,65.305 cw(c260.636,65.705) 260.071,65.705 ; v2@261.053,74.003 ccw(c261.053,74.298) 261.262,74.089 cw(c261.053,74.298) v2@261.053,74.003 ; v2@261.252,73.804 cw(c261.914,73.804) 261.446,74.273 ccw(c261.914,73.804) v2@261.252,73.804 ; U1B.18@264.913,77.488 cw(c264.708,77.282) 264.998,77.282 ccw(c264.708,77.282) U1B.18@264.913,77.488 ; 264.998,77.272 cw(c265.304,77.272) 265.088,77.488 ccw(c265.304,77.272) 264.998,77.272
  Bottom Layer w0.203: v2(259.994,70.612) 259.994,71.044 ; v2(261.053,73.804) 261.053,73.685 261.053,72.103 259.994,71.044 ; 259.994,71.044 ccw(c260.365,71.044) 260.124,70.763 cw(c260.365,71.044) 259.994,71.044 ; 259.994,71.044 cw(c259.624,71.044) 259.865,70.763 ccw(c259.624,71.044) 259.994,71.044 ; 261.053,73.325 ccw(c260.574,73.325) 260.913,73.664 cw(c260.574,73.325) 261.053,73.325 ; 261.053,73.325 cw(c261.532,73.325) 261.193,73.664 ccw(c261.532,73.325) 261.053,73.325
NetD2C_1: D2C.1 HDMI2.11 U1C.14 | length 28.8
  Top Layer w0.152: v2(251.917,66.777) 251.005,66.777 ; U1C.14@253.441,72.284 253.441,70.46 251.943,68.961 251.485,68.961 250.942,68.418 250.942,68.399 ; v2@253.71,63.489 cw(c253.256,62.702) 254.134,62.937 ; v2(253.746,63.551) 253.746,63.271 254.55,62.467 HDMI2.11@254.55,60.92 ; v2@253.786,63.621 cw(c253.516,63.152) 254.039,63.292 ; 253.909,63.208 cw(c254.204,63.286) v2@253.94,63.439 ; 250.693,67.088 ccw(c250.548,67.088) 250.615,67.217 cw(c250.548,67.088) 250.693,67.088 ; 250.693,67.088 cw(c250.809,67.088) 250.778,67.199 ccw(c250.809,67.088) 250.693,67.088 ; 250.942,68.399 ccw(c251.17,68.171) 250.904,67.991 cw(c251.17,68.171) 250.942,68.399 ; 250.942,68.399 250.693,68.149 250.693,67.089 251.005,66.777 ; 251.005,66.777 cw(c251.334,67.106) 250.918,67.315 ccw(c251.334,67.106) 251.005,66.777 ; 251.377,66.777 ccw(c251.377,67.317) 251.759,66.935 cw(c251.377,67.317) 251.377,66.777 ; 251.377,66.777 cw(c251.377,66.236) 251.759,66.618 ccw(c251.377,66.236) 251.377,66.777 ; D2C.1@250.646,67.452 ccw(c250.937,67.305) 250.707,67.075 cw(c250.937,67.305) D2C.1@250.646,67.452 ; D2C.1@250.777,67.905 cw(c251.014,68.066) 250.812,68.268 ccw(c251.014,68.066) D2C.1@250.777,67.905 ; D2C.1@250.782,67.383 ccw(c251.136,67.206) 250.856,66.926 cw(c251.136,67.206) D2C.1@250.782,67.383 ; U1C.14@253.345,71.67 cw(c253.113,71.438) 253.441,71.438 ccw(c253.113,71.438) U1C.14@253.345,71.67 ; 253.441,71.394 cw(c253.832,71.394) 253.556,71.67 ccw(c253.832,71.394) 253.441,71.394 ; v2@253.665,63.551 ccw(c254.144,63.551) 253.805,63.212 cw(c254.144,63.551) v2@253.665,63.551 ; v2@253.817,63.551 ccw(c254.664,63.551) 254.065,62.952 cw(c254.664,63.551) v2@253.817,63.551 ; v2@253.97,63.551 ccw(c255.185,63.551) 254.326,62.692 cw(c255.185,63.551) v2@253.97,63.551 ; HDMI2.11@254.507,62.129 ccw(c254.404,62.232) 254.55,62.232 cw(c254.404,62.232) HDMI2.11@254.507,62.129 ; 254.55,62.243 ccw(c254.712,62.243) 254.598,62.129 cw(c254.712,62.243) 254.55,62.243
  Bottom Layer w0.152: v2(251.917,66.777) 253.746,64.948 v2(253.746,63.551)
NetD2C_3: D2C.3 HDMI2.12 U1C.13 | length 30.4
  Top Layer w0.152: D2C.3@248.77,67.917 ccw(c248.491,68.215) 248.899,68.202 ; D2C.3@248.874,67.806 ccw(c248.503,68.202) 249.045,68.184 ; 248.9,68.236 ccw(c249.204,68.226) D2C.3@248.982,68.018 ; v2(250.305,68.618) 249.237,68.618 ; U1C.13@252.8,72.3 252.8,70.618 v2(252.806,70.612) ; 253.915,62.36 ccw(c254.267,62.454) HDMI2.12@254.084,62.139 ; HDMI2.12@254.05,60.92 254.05,62.282 251.511,64.821 251.511,65.38 250.611,66.279 249.113,66.279 248.793,66.599 248.793,68.174 ; 248.793,68.174 ccw(c248.885,68.174) 248.865,68.084 cw(c248.885,68.174) 248.793,68.174 ; 248.793,68.174 cw(c248.678,68.174) 248.726,68.069 ccw(c248.678,68.174) 248.793,68.174 ; 248.793,68.174 249.237,68.618 ; 249.237,68.618 ccw(c249.768,68.086) 249.036,67.916 cw(c249.768,68.086) 249.237,68.618 ; 249.765,68.618 ccw(c249.765,69.158) 250.147,68.776 cw(c249.765,69.158) 249.765,68.618 ; 249.765,68.618 cw(c249.765,68.077) 250.147,68.459 ccw(c249.765,68.077) 249.765,68.618 ; 252.8,71.416 ccw(c252.441,71.416) 252.695,71.67 cw(c252.441,71.416) 252.8,71.416 ; 252.8,71.416 cw(c253.16,71.416) 252.906,71.67 ccw(c253.16,71.416) 252.8,71.416 ; D2C.3@248.66,67.257 cw(c248.339,66.936) 248.793,66.936 ccw(c248.339,66.936) D2C.3@248.66,67.257 ; D2C.3@248.74,67.847 cw(c249.139,67.94) 248.849,68.229 ccw(c249.139,67.94) D2C.3@248.74,67.847 ; 248.793,66.814 cw(c249.42,66.814) 248.977,67.257 ccw(c249.42,66.814) 248.793,66.814 ; D2C.3@248.888,67.881 cw(c249.454,68.013) 249.043,68.424 ccw(c249.454,68.013) D2C.3@248.888,67.881 ; v2@252.648,70.77 ccw(c252.28,71.138) 252.8,71.138 cw(c252.28,71.138) v2@252.648,70.77 ; 252.8,71.166 ccw(c253.361,71.166) 252.964,70.77 cw(c253.361,71.166) 252.8,71.166 ; 253.805,62.526 cw(c253.362,62.084) 253.989,62.084 ccw(c253.362,62.084) 253.805,62.526 ; HDMI2.12@254.007,62.129 ccw(c253.904,62.232) 254.05,62.232 cw(c253.904,62.232) HDMI2.12@254.007,62.129 ; 254.05,62.243 ccw(c254.212,62.243) 254.098,62.129 cw(c254.212,62.243) 254.05,62.243 ; 254.065,62.266 cw(c253.883,62.084) 254.141,62.084 ccw(c253.883,62.084) 254.065,62.266
  Bottom Layer w0.152: v2(250.305,68.618) 250.456,68.769 250.963,68.769 v2(252.806,70.612)
NetD2C_4: D2C.4 HDMI2.14 U1C.18 | length 34.1
  Top Layer w0.152: v2(247.599,69.24) 247.599,67.361 248.793,66.167 248.793,63.805 249.027,63.571 251.77,63.571 253.05,62.291 HDMI2.14@253.05,60.92 ; v2(248.92,73.838) 251.5,76.418 251.5,76.759 ; 251.5,76.494 251.5,76.759 ; U1C.18@251.5,78.1 251.5,76.759 ; 252.915,62.36 ccw(c253.267,62.454) HDMI2.14@253.084,62.139 ; 247.599,68.7 ccw(c247.059,68.7) 247.441,69.082 cw(c247.059,68.7) 247.599,68.7 ; 247.599,68.7 cw(c248.139,68.7) 247.757,69.082 ccw(c248.139,68.7) 247.599,68.7 ; 251.5,77.216 ccw(c251.141,77.216) 251.395,77.47 cw(c251.141,77.216) 251.5,77.216 ; 251.5,77.216 cw(c251.86,77.216) 251.606,77.47 ccw(c251.86,77.216) 251.5,77.216 ; D2C.4@248.66,64.557 cw(c248.339,64.236) 248.793,64.236 ccw(c248.339,64.236) D2C.4@248.66,64.557 ; D2C.4@248.66,65.323 ccw(c248.339,65.644) 248.793,65.644 cw(c248.339,65.644) D2C.4@248.66,65.323 ; 248.793,64.114 cw(c249.42,64.114) 248.977,64.557 ccw(c249.42,64.114) 248.793,64.114 ; 248.793,65.767 ccw(c249.42,65.767) 248.977,65.323 cw(c249.42,65.767) 248.793,65.767 ; 252.799,62.542 cw(c252.34,62.084) 252.989,62.084 ccw(c252.34,62.084) 252.799,62.542 ; HDMI2.14@253.007,62.129 ccw(c252.904,62.232) 253.05,62.232 cw(c252.904,62.232) HDMI2.14@253.007,62.129 ; 253.05,62.243 ccw(c253.212,62.243) 253.098,62.129 cw(c253.212,62.243) 253.05,62.243 ; 253.059,62.282 cw(c252.86,62.084) 253.141,62.084 ccw(c252.86,62.084) 253.059,62.282
  Bottom Layer w0.152: v2(247.599,69.24) 247.599,69.626 ; 248.31,73.711 248.361,73.762 ; v2(248.92,73.838) 248.437,73.838 ; 247.599,69.626 ccw(c247.82,69.626) 247.71,69.435 cw(c247.82,69.626) 247.599,69.626 ; 247.599,69.626 cw(c247.379,69.626) 247.488,69.435 ccw(c247.379,69.626) 247.599,69.626 ; 247.599,69.626 247.756,69.783 247.756,73.157 248.361,73.762 ; 248.361,73.762 248.437,73.838 ; 248.437,73.838 ccw(c248.437,74.246) 248.749,73.982 cw(c248.437,74.246) 248.437,73.838 ; 248.437,73.838 cw(c248.437,73.429) 248.749,73.693 ccw(c248.437,73.429) 248.437,73.838
NetD2D_1: D2D.1 HDMI3.5 U1D.14 | length 24.4
  Top Layer w0.152: HDMI3.5@238.211,60.935 238.211,62.779 237.312,63.678 235.687,63.678 234.772,64.592 234.772,66.04 234.188,66.624 233.782,66.624 233.578,66.827 D2D.1@233.578,67.927 233.578,68.631 ; U1D.14@240.1,72.339 240.1,70.925 239.101,69.926 236.261,69.926 235.321,68.986 233.934,68.986 233.578,68.631 ; 233.578,67.162 ccw(c233.038,67.162) 233.42,67.544 cw(c233.038,67.162) 233.578,67.162 ; 233.578,67.162 cw(c234.119,67.162) 233.737,67.544 ccw(c234.119,67.162) 233.578,67.162 ; 233.578,68.631 ccw(c233.978,68.631) 233.722,68.324 cw(c233.978,68.631) 233.578,68.631 ; 233.578,68.631 cw(c233.179,68.631) 233.435,68.324 ccw(c233.179,68.631) 233.578,68.631 ; 238.211,62.249 ccw(c238.365,62.249) 238.256,62.14 cw(c238.365,62.249) 238.211,62.249 ; 238.211,62.249 cw(c238.057,62.249) 238.165,62.14 ccw(c238.057,62.249) 238.211,62.249 ; 240.1,71.455 ccw(c239.741,71.455) 239.995,71.709 cw(c239.741,71.455) 240.1,71.455 ; 240.1,71.455 cw(c240.46,71.455) 240.206,71.709 ccw(c240.46,71.455) 240.1,71.455
NetD2D_3: D2D.3 HDMI3.6 U1D.13 | length 27.5
  Top Layer w0.152: 231.678,68.585 231.678,68.529 ; HDMI3.6@237.711,60.935 237.711,62.721 237.058,63.373 235.28,63.373 234.366,64.287 234.366,65.786 233.909,66.243 232.308,66.243 231.678,66.904 D2D.3@231.678,67.927 231.678,68.529 ; 239.425,71.044 238.612,70.231 236.017,70.231 235.158,69.372 233.65,69.372 232.948,70.074 232.278,70.074 231.678,69.474 231.678,68.529 ; 239.45,71.069 U1D.13@239.45,72.339 ; 231.678,67.162 ccw(c231.138,67.162) 231.52,67.544 cw(c231.138,67.162) 231.678,67.162 ; 231.678,67.162 cw(c232.219,67.162) 231.837,67.544 ccw(c232.219,67.162) 231.678,67.162 ; 231.678,68.529 ccw(c231.884,68.529) 231.786,68.349 cw(c231.884,68.529) 231.678,68.529 ; 231.678,68.529 cw(c231.473,68.529) 231.571,68.349 ccw(c231.473,68.529) 231.678,68.529 ; 237.711,62.249 ccw(c237.865,62.249) 237.756,62.14 cw(c237.865,62.249) 237.711,62.249 ; 237.711,62.249 cw(c237.557,62.249) 237.665,62.14 ccw(c237.557,62.249) 237.711,62.249 ; 239.45,71.455 ccw(c239.091,71.455) 239.345,71.709 cw(c239.091,71.455) 239.45,71.455 ; 239.45,71.455 cw(c239.81,71.455) 239.556,71.709 ccw(c239.81,71.455) 239.45,71.455
NetD2D_4: D2D.4 HDMI3.8 U1D.18 | length 36.8
  Top Layer w0.152: D2D.4@231.678,65.227 231.678,64.618 ; HDMI3.8@236.711,60.935 236.711,62.527 236.474,62.763 234.747,62.763 233.604,63.906 232.39,63.906 231.678,64.618 ; 231.678,64.618 ccw(c231.46,64.618) 231.568,64.808 cw(c231.46,64.618) 231.678,64.618 ; 231.678,64.618 cw(c231.897,64.618) 231.789,64.808 ccw(c231.897,64.618) 231.678,64.618 ; 236.711,62.249 ccw(c236.865,62.249) 236.756,62.14 cw(c236.865,62.249) 236.711,62.249 ; 236.711,62.249 cw(c236.557,62.249) 236.665,62.14 ccw(c236.557,62.249) 236.711,62.249
  Top Layer w0.203: v2(230.988,69.926) 230.988,66.853 231.678,66.162 D2D.4@231.678,65.227 ; v2@231.669,74.448 cw(c232.005,74.38) 231.916,74.711 ; v2(231.673,74.447) 233.147,75.921 237.084,75.921 238.15,76.987 U1D.18@238.15,78.139 ; 230.988,69.447 ccw(c230.509,69.447) 230.847,69.786 cw(c230.509,69.447) 230.988,69.447 ; 230.988,69.447 cw(c231.467,69.447) 231.128,69.786 ccw(c231.467,69.447) 230.988,69.447 ; 231.678,65.931 ccw(c232.157,65.931) 231.819,65.592 cw(c232.157,65.931) 231.678,65.931 ; 231.678,65.931 cw(c231.199,65.931) 231.538,65.592 ccw(c231.199,65.931) 231.678,65.931 ; 232.012,74.786 ccw(c232.351,74.447) 231.872,74.447 cw(c232.351,74.447) 232.012,74.786 ; 232.012,74.786 cw(c231.673,75.125) 231.673,74.646 ccw(c231.673,75.125) 232.012,74.786 ; 238.15,77.316 ccw(c237.852,77.316) 238.063,77.527 cw(c237.852,77.316) 238.15,77.316 ; 238.15,77.316 cw(c238.448,77.316) 238.238,77.527 ccw(c238.448,77.316) 238.15,77.316
  Bottom Layer w0.203: v2(230.988,69.926) 230.988,73.762 v2(231.673,74.447) ; 230.988,70.405 ccw(c231.467,70.405) 231.128,70.066 cw(c231.467,70.405) 230.988,70.405 ; 230.988,70.405 cw(c230.509,70.405) 230.847,70.066 ccw(c230.509,70.405) 230.988,70.405 ; 231.335,74.109 ccw(c230.996,74.447) 231.475,74.447 cw(c230.996,74.447) 231.335,74.109 ; 231.335,74.109 cw(c231.673,73.77) 231.673,74.249 ccw(c231.673,73.77) 231.335,74.109
NetD3A_1: D3A.1 HDMI1.9 U1A.17 | length 31
  Top Layer w0.152: HDMI1.9@275.1,60.909 275.1,62.745 275.971,63.616 275.971,66.142 275.107,67.005 ; 279.35,70.342 cw(c279.665,70.258) v2@279.6,70.577 ; 279.461,70.232 ccw(c279.376,70.547) v2@279.695,70.481 ; U1A.17@279.502,78.105 279.502,76.454 280.416,75.54 v2(280.416,73.609) ; v2(279.616,70.498) 279.019,69.901 277.876,69.901 277.241,69.266 275.615,69.266 275.107,68.758 D3A.1@275.107,67.724 275.107,67.005 ; 275.1,62.223 ccw(c275.254,62.223) 275.145,62.114 cw(c275.254,62.223) 275.1,62.223 ; 275.1,62.223 cw(c274.946,62.223) 275.055,62.114 ccw(c274.946,62.223) 275.1,62.223 ; 275.107,67.005 ccw(c274.675,67.005) 274.96,67.331 cw(c274.675,67.005) 275.107,67.005 ; 275.107,67.005 cw(c275.54,67.005) 275.255,67.331 ccw(c275.54,67.005) 275.107,67.005 ; 275.107,68.489 ccw(c275.648,68.489) 275.266,68.107 cw(c275.648,68.489) 275.107,68.489 ; 275.107,68.489 cw(c274.567,68.489) 274.949,68.107 ccw(c274.567,68.489) 275.107,68.489 ; 279.234,70.116 ccw(c278.852,70.498) 279.392,70.498 cw(c278.852,70.498) 279.234,70.116 ; 279.234,70.116 cw(c279.616,69.734) 279.616,70.274 ccw(c279.616,69.734) 279.234,70.116 ; U1A.17@279.4,77.479 cw(c279.156,77.235) 279.502,77.235 ccw(c279.156,77.235) U1A.17@279.4,77.479 ; 279.502,77.216 cw(c279.874,77.216) 279.611,77.479 ccw(c279.874,77.216) 279.502,77.216
  Bottom Layer w0.152: v2(279.616,70.498) 279.616,72.809 v2(280.416,73.609) ; 279.616,71.038 ccw(c280.156,71.038) 279.774,70.656 cw(c280.156,71.038) 279.616,71.038 ; 279.616,71.038 cw(c279.076,71.038) 279.458,70.656 ccw(c279.076,71.038) 279.616,71.038
NetD3A_4: D3A.4 HDMI1.12 U1A.11 | length 28.4
  Top Layer w0.203: v2(272.491,65.456) 272.567,65.38 272.567,65.227 272.771,65.024 ; HDMI1.12@273.6,60.909 273.6,62.518 273.207,62.911 D3A.4@273.207,65.024 272.771,65.024 ; v2(276.504,69.952) 277.317,69.952 278.856,71.49 ; 278.589,71.25 cw(c279.27,71.067) U1A.11@278.917,71.678 ; U1A.11@278.856,72.309 278.856,71.49 ; 272.771,65.024 ccw(c272.771,65.406) 273.058,65.155 cw(c272.771,65.406) 272.771,65.024 ; 272.771,65.024 cw(c272.771,64.642) 273.058,64.893 ccw(c272.771,64.642) 272.771,65.024 ; 272.771,65.024 cw(c273.031,65.284) 272.68,65.396 ccw(c273.031,65.284) 272.771,65.024 ; 273.207,64.32 ccw(c272.728,64.32) 273.067,64.659 cw(c272.728,64.32) 273.207,64.32 ; 273.207,64.32 cw(c273.686,64.32) 273.348,64.659 ccw(c273.686,64.32) 273.207,64.32 ; 276.983,69.952 ccw(c276.983,69.473) 276.645,69.811 cw(c276.983,69.473) 276.983,69.952 ; 276.983,69.952 cw(c276.983,70.431) 276.645,70.092 ccw(c276.983,70.431) 276.983,69.952 ; 278.856,71.49 ccw(c278.566,71.49) 278.769,71.696 cw(c278.566,71.49) 278.856,71.49 ; 278.856,71.49 cw(c279.145,71.49) 278.942,71.696 ccw(c279.145,71.49) 278.856,71.49 ; 278.437,71.071 ccw(c277.724,71.784) 278.732,71.784 cw(c277.724,71.784) 278.437,71.071 ; 278.784,71.418 ccw(c278.417,71.784) 278.935,71.784 cw(c278.417,71.784) 278.784,71.418
  Bottom Layer w0.203: v2(272.491,65.456) 272.491,67.97 274.472,69.952 v2(276.504,69.952) ; 272.491,65.935 ccw(c272.97,65.935) 272.631,65.596 cw(c272.97,65.935) 272.491,65.935 ; 272.491,65.935 cw(c272.012,65.935) 272.351,65.596 ccw(c272.012,65.935) 272.491,65.935 ; 276.025,69.952 ccw(c276.025,70.431) 276.364,70.092 cw(c276.025,70.431) 276.025,69.952 ; 276.025,69.952 cw(c276.025,69.473) 276.364,69.811 ccw(c276.025,69.473) 276.025,69.952
NetD3A_6: D3A.6 HDMI1.11 U1A.12 | length 31.1
  Top Layer w0.152: v2(273.329,69.698) 272.644,69.012 272.644,67.056 273.431,66.269 274.396,66.269 275.107,65.557 ; HDMI1.11@274.1,60.909 274.1,62.62 275.082,63.602 ; 274.719,65.864 ccw(c275.598,66.099) D3A.6@275.143,65.311 ; D3A.6@274.814,65.508 ccw(c275.338,65.649) D3A.6@275.067,65.179 ; D3A.6@274.914,65.361 ccw(c274.65,65.513) 274.944,65.592 ; D3A.6@274.965,65.515 ccw(c275.26,65.594) D3A.6@275.136,65.314 ; 275.107,63.627 D3A.6@275.107,65.024 275.107,65.557 ; v2@278.66,70.552 cw(c278.979,70.487) 278.895,70.801 ; v2(278.74,70.536) 279.506,71.302 U1A.12@279.506,72.309 ; v2@278.756,70.456 ccw(c278.691,70.775) 279.005,70.691 ; 274.1,62.223 ccw(c274.254,62.223) 274.145,62.114 cw(c274.254,62.223) 274.1,62.223 ; 274.1,62.223 cw(c273.946,62.223) 274.055,62.114 ccw(c273.946,62.223) 274.1,62.223 ; 275.107,64.259 ccw(c274.567,64.259) 274.949,64.641 cw(c274.567,64.259) 275.107,64.259 ; 275.107,64.259 cw(c275.648,64.259) 275.266,64.641 ccw(c275.648,64.259) 275.107,64.259 ; 275.107,65.557 ccw(c275.208,65.557) 275.177,65.462 cw(c275.208,65.557) 275.107,65.557 ; 275.107,65.557 cw(c275.007,65.557) 275.038,65.462 ccw(c275.007,65.557) 275.107,65.557 ; 279.122,70.918 ccw(c279.504,70.536) 278.963,70.536 cw(c279.504,70.536) 279.122,70.918 ; 279.122,70.918 cw(c278.74,71.3) 278.74,70.76 ccw(c278.74,71.3) 279.122,70.918 ; 279.506,71.425 ccw(c279.146,71.425) 279.4,71.679 cw(c279.146,71.425) 279.506,71.425 ; 279.506,71.425 cw(c279.865,71.425) 279.611,71.679 ccw(c279.865,71.425) 279.506,71.425 ; 274.507,66.158 cw(c273.599,65.249) 274.884,65.249 ccw(c273.599,65.249) 274.507,66.158 ; 274.767,65.897 cw(c274.119,65.249) 275.036,65.249 ccw(c274.119,65.249) 274.767,65.897 ; 275.028,65.637 cw(c274.639,65.249) 275.188,65.249 ccw(c274.639,65.249) 275.028,65.637
  Bottom Layer w0.152: v2(273.329,69.698) 274.168,70.536 v2(278.74,70.536)
NetD3B_1: D3B.1 HDMI2.3 U1B.17 | length 32.5
  Top Layer w0.152: D3B.1@258.242,67.635 258.242,67.005 ; HDMI2.3@258.552,60.924 258.552,62.337 258.597,62.382 258.597,63.119 258.928,63.449 258.928,66.319 258.242,67.005 ; 258.242,67.005 ccw(c257.984,67.005) 258.119,67.225 cw(c257.984,67.005) 258.242,67.005 ; 258.242,67.005 cw(c258.512,67.005) 258.361,67.229 ccw(c258.512,67.005) 258.242,67.005 ; 258.552,62.238 ccw(c258.706,62.238) 258.598,62.129 cw(c258.706,62.238) 258.552,62.238 ; 258.552,62.238 cw(c258.398,62.238) 258.507,62.129 ccw(c258.398,62.238) 258.552,62.238
  Top Layer w0.203: D3B.1@258.242,67.645 v2(258.242,68.707) ; v2@262.225,73.788 cw(c262.561,73.719) 262.472,74.05 ; v2(262.23,73.787) 265.625,77.182 U1B.17@265.625,78.1 ; v2@262.231,73.782 ccw(c262.162,74.118) 262.493,74.029 ; 258.242,68.228 ccw(c257.763,68.228) 258.102,68.567 cw(c257.763,68.228) 258.242,68.228 ; 258.242,68.228 cw(c258.721,68.228) 258.382,68.567 ccw(c258.721,68.228) 258.242,68.228 ; 262.568,74.126 ccw(c262.907,73.787) 262.428,73.787 cw(c262.907,73.787) 262.568,74.126 ; 262.568,74.126 cw(c262.23,74.464) 262.23,73.985 ccw(c262.23,74.464) 262.568,74.126 ; D3B.1@258.097,68.005 ccw(c257.746,68.356) 258.242,68.356 cw(c257.746,68.356) D3B.1@258.097,68.005 ; 258.242,68.332 ccw(c258.704,68.332) 258.377,68.005 cw(c258.704,68.332) 258.242,68.332 ; U1B.17@265.563,77.488 cw(c265.414,77.338) 265.625,77.338 ccw(c265.414,77.338) U1B.17@265.563,77.488 ; 265.625,77.216 cw(c266.01,77.216) 265.738,77.488 ccw(c266.01,77.216) 265.625,77.216
  Bottom Layer w0.203: v2(258.242,68.707) 258.242,68.859 258.242,69.494 258.805,70.058 260.071,70.058 ; 260.224,70.058 260.071,70.058 ; v2(262.23,73.787) 262.23,71.857 260.431,70.058 260.071,70.058 ; 258.242,69.186 ccw(c258.721,69.186) 258.382,68.847 cw(c258.721,69.186) 258.242,69.186 ; 258.242,69.186 cw(c257.763,69.186) 258.102,68.847 ccw(c257.763,69.186) 258.242,69.186 ; 262.23,73.308 ccw(c261.751,73.308) 262.089,73.647 cw(c261.751,73.308) 262.23,73.308 ; 262.23,73.308 cw(c262.709,73.308) 262.37,73.647 ccw(c262.709,73.308) 262.23,73.308
NetD3B_4: D3B.4 HDMI2.6 U1B.11 | length 26.3
  Top Layer w0.152: HDMI2.6@257.05,60.924 257.05,62.865 ; 257.05,63.142 257.05,62.865 ; v2(259.029,69.494) 256.845,69.494 255.626,68.275 255.626,66.98 255.88,66.726 255.88,66.065 256.337,65.608 ; v2(262.839,70.307) 263.373,70.307 ; 264.998,71.222 264.998,71.323 ; U1B.11@265,72.3 264.998,72.298 264.998,71.323 ; 256.337,64.175 ccw(c255.797,64.175) 256.179,64.557 cw(c255.797,64.175) 256.337,64.175 ; 256.337,64.175 cw(c256.877,64.175) 256.495,64.557 ccw(c256.877,64.175) 256.337,64.175 ; 256.337,65.608 ccw(c256.663,65.608) 256.47,65.345 cw(c256.663,65.608) 256.337,65.608 ; 256.337,65.608 cw(c256.01,65.608) 256.204,65.345 ccw(c256.01,65.608) 256.337,65.608 ; 256.337,65.608 D3B.4@256.337,64.94 256.337,63.932 257.05,63.219 257.05,62.865 ; 263.373,70.307 ccw(c263.373,69.784) 262.999,70.15 cw(c263.373,69.784) 263.373,70.307 ; 263.373,70.307 cw(c263.373,70.831) 262.999,70.464 ccw(c263.373,70.831) 263.373,70.307 ; 263.373,70.307 263.576,70.51 264.465,70.51 264.998,71.044 264.998,71.323 ; HDMI2.6@257.007,62.129 ccw(c256.904,62.232) 257.05,62.232 cw(c256.904,62.232) HDMI2.6@257.007,62.129 ; 257.05,62.243 ccw(c257.212,62.243) 257.098,62.129 cw(c257.212,62.243) 257.05,62.243 ; U1B.11@264.895,71.67 cw(c264.646,71.421) 264.998,71.421 ccw(c264.646,71.421) U1B.11@264.895,71.67 ; 264.998,71.41 cw(c265.365,71.41) 265.106,71.67 ccw(c265.365,71.41) 264.998,71.41
  Bottom Layer w0.152: v2(259.029,69.494) 260.68,69.494 261.417,70.231 262.763,70.231 v2(262.839,70.307)